# Altium PCB Pong_PCB.PcbDoc
Units mm, origin at the board's own origin, x right, y up, seen from the top; angles counter-clockwise.
Board outline 70 x 100 mm, 2 copper layers (Top Layer, Bottom Layer), stack 1.57 mm thick; 27 components, 30 nets, 132 pads, 17 vias.
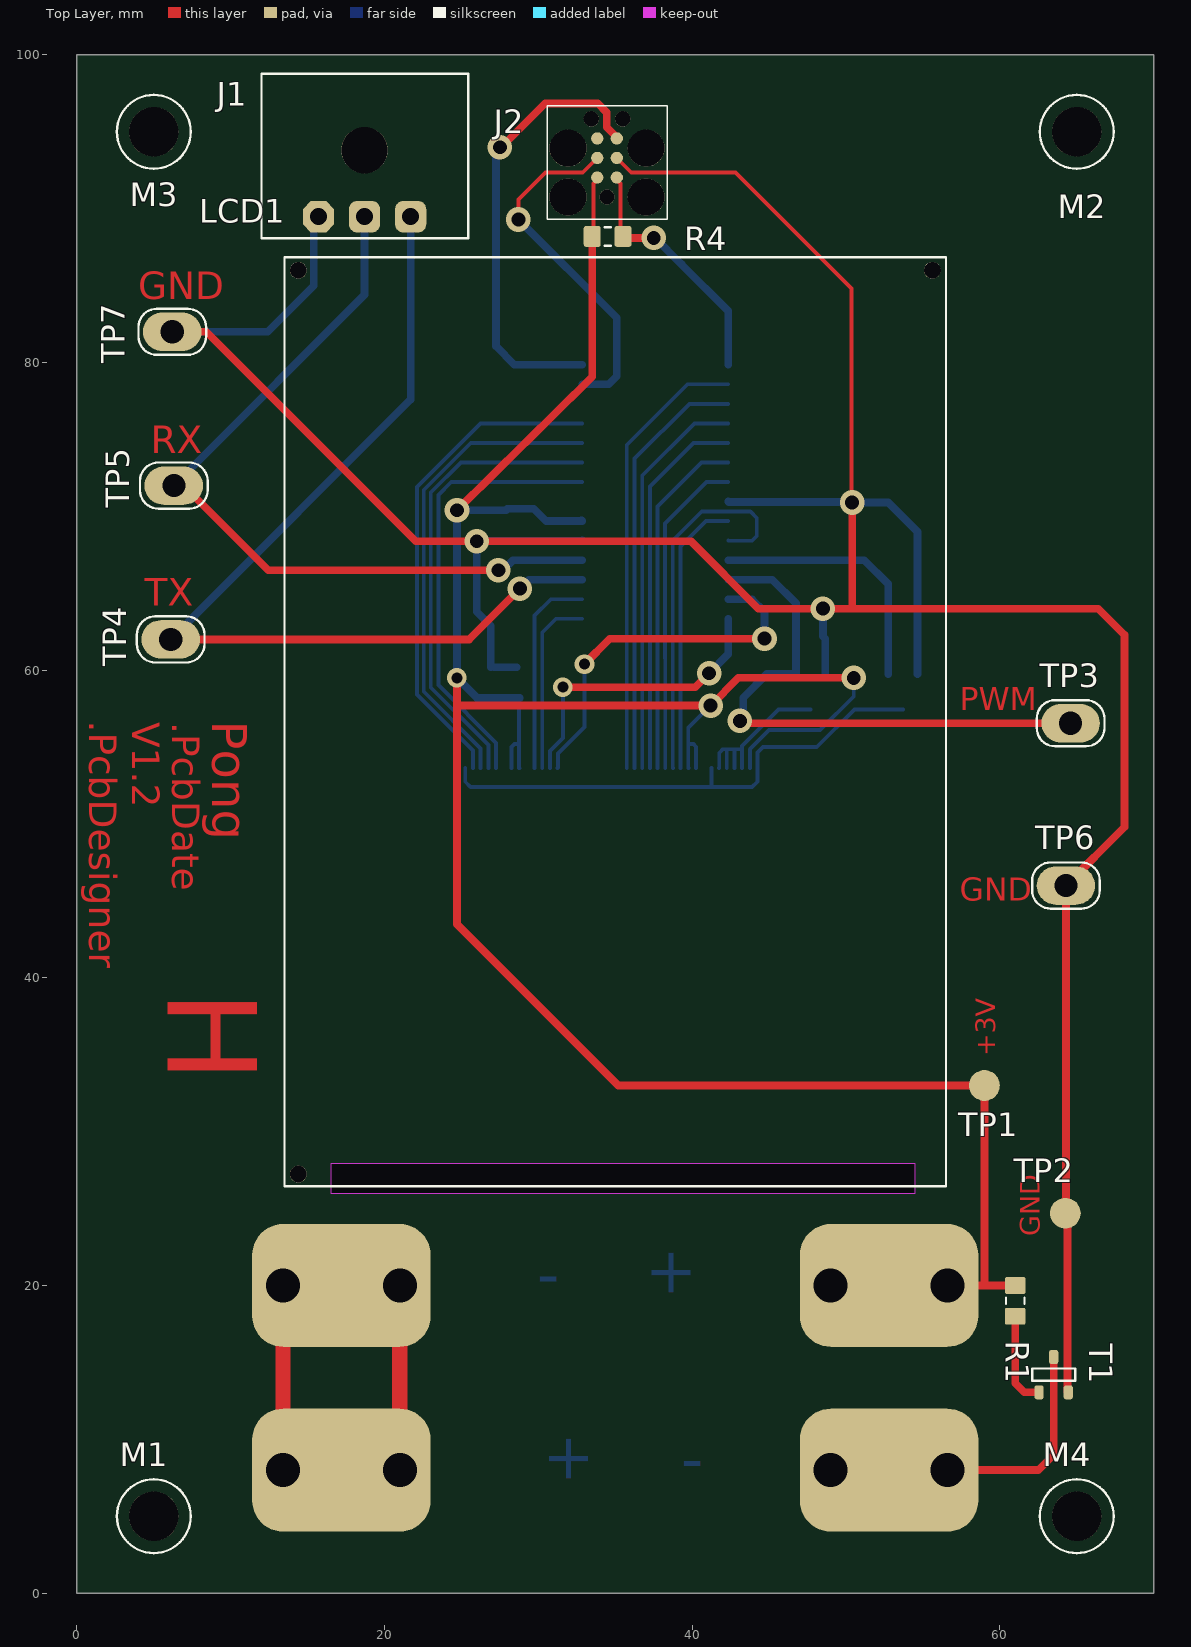
[diagram p0: Top Layer view]
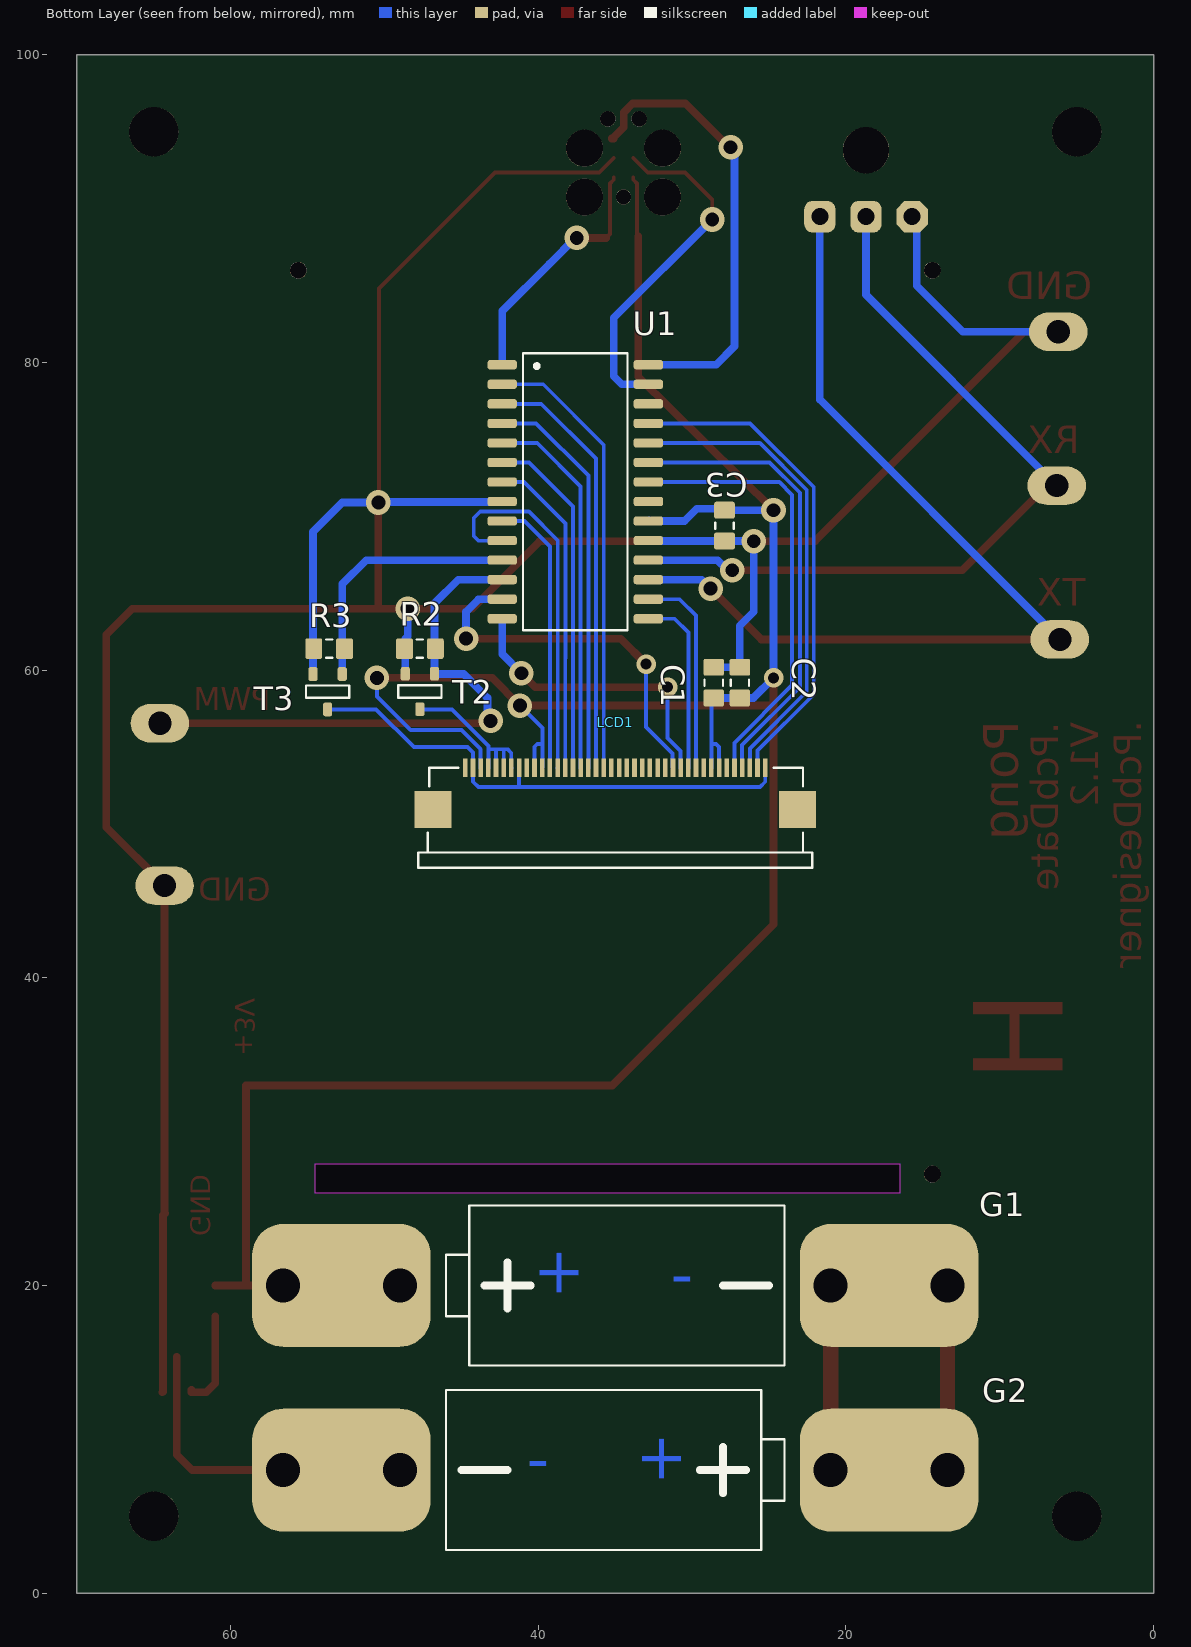
[diagram p1: Bottom Layer view, seen from below]
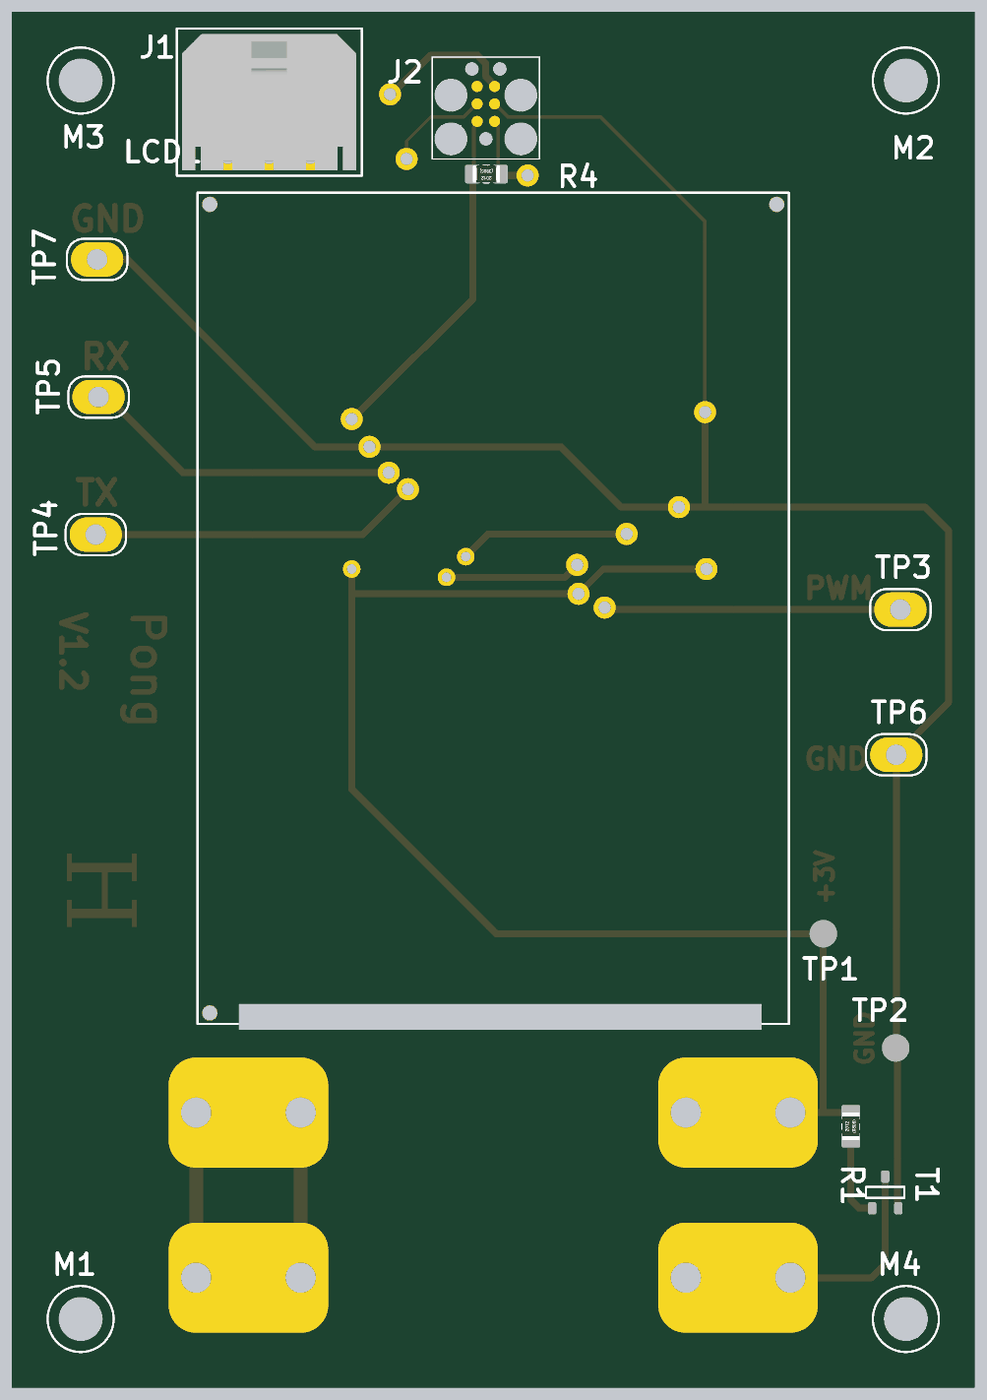
[diagram p2: 3D render of the assembled board from above, using the file's embedded part models]

## Layer stack, top to bottom
Top Layer: signal copper 0.035
Dielectric 1: core 1.5, FR-4, Dk 4.2
Bottom Layer: signal copper 0.035

## Board outline
0,0 0,100 70,100 70,0
cut-out: 16.5,27.9 16.5,26 54.5,26 54.5,27.9

## Design rules (kind name [scope] priority, off if disabled: settings)
AcuteAngle [All] p1: minimum=9.00000000000000E+0001 checktracksonly=TRUE
AssemblyTestPointUsage [All] p1 off:
AssemblyTestpoint [All] p1 off: testpointundercomponent=TRUE minsize=1.016 maxsize=2.54 preferedsize=1.524 minholesize=0 maxholesize=1.016 preferedholesize=0.813 testpointgrid=0.025 usegrid=TRUE gridtolerance=0 allowsidetop=TRUE allowsidebottom=TRUE
BoardOutlineClearance [All] p1 off: gap=0.25 ignorepadtopadclearanceinfootprint=FALSE
Clearance [All] p1: gap=0.2 ignorepadtopadclearanceinfootprint=FALSE except(0.8: Arc-Fill Arc-Poly Arc-Region Track-Fill Track-Poly Track-Region)
ComponentClearance [All] p1 off: gap=0.25 collisioncheckmode=3 verticalgap=0.25 showdistances=FALSE
DiffPairsRouting [All] p1 off: maxlimit=0.254 minlimit=0.254 mostfreqgap=0.254 toplayer_minwidth=0.381 toplayer_maxwidth=0.381 toplayer_prefwidth=0.381 bottomlayer_minwidth=0.381 bottomlayer_maxwidth=0.381 bottomlayer_prefwidth=0.381 maxuncoupledlength=12.7
FabricationTestPointUsage [All] p1 off: valid=0 allowmultiple=FALSE
FabricationTestpoint [All] p1 off: side=3 testpointundercomponent=TRUE minsize=1.016 maxsize=2.54 preferedsize=1.524 minholesize=0 maxholesize=1.016 preferedholesize=0.813 testpointgrid=0.025 allowsidetop=TRUE allowsidebottom=TRUE usegrid=TRUE gridtolerance=0
FanoutControl Fanout_BGA [IsBGA] p1 off: bgadir=Out bgaviamode=Centered fanoutstyle=Auto fanoutdirection=Alternating viagrid=0.025 // Fanout_BGA (Default Rule)
FanoutControl Fanout_LCC [IsLCC] p2 off: bgadir=Out bgaviamode=Centered fanoutstyle=Auto fanoutdirection=Alternating viagrid=0.025 // Fanout_LCC (Default Rule)
FanoutControl Fanout_SOIC [IsSOIC] p3 off: bgadir=Out bgaviamode=Centered fanoutstyle=Auto fanoutdirection=Alternating viagrid=0.025 // Fanout_SOIC (Default Rule)
FanoutControl Fanout_Small [(CompPinCount < 5)] p4 off: bgadir=Out bgaviamode=Centered fanoutstyle=Auto fanoutdirection=OutThenIn viagrid=0.025 // Fanout_Small (Default Rule)
FanoutControl Fanout_Default [All] p5 off: bgadir=Out bgaviamode=Centered fanoutstyle=Auto fanoutdirection=Alternating viagrid=0.025 // Fanout_Default (Default Rule)
Height [All] p1 off: minheight=0 maxheight=25.4 prefheight=12.7
HoleSize [All] p1 off: absolutevalues=TRUE maxlimit=3 minlimit=0.15 maxpercent=80.000 minpercent=20.000
HoleToHoleClearance [All] p1 off: gap=0.25 allowstackedmicrovias=TRUE
LayerPairs [All] p1 off: enforce=TRUE
MinimumAnnularRing [All] p1 off: minimumring=0.35
MinimumSolderMaskSliver [All] p1 off: minsoldermaskwidth=0
PasteMaskExpansion [All] p1 off: expansion=0
PlaneClearance [All] p1: clearance=0.25
PlaneConnect [All] p1 off: planeconnectstyle=Relief reliefexpansion=0.5 reliefentries=4 reliefconductorwidth=0.25 reliefairgap=0.25
PolygonConnect [All] p1: connectstyle=Relief reliefconductorwidth=0.25 reliefentries=4 polygonreliefangle="90 Angle" airgapwidth=0.25
RoutingCorners [All] p1 off: cornerstyle=45-Degree minsetback=2.5 maxsetback=2.5
RoutingLayers [All] p1 off: top layer_v5=TRUE bottom layer_v5=TRUE
RoutingPriority [All] p1 off: routingpriority=0
RoutingTopology [All] p1 off: topology=Shortest
RoutingVias [All] p1: holewidth=0.9 width=1.5 viastyle="Through Hole" minholewidth=0.9 minwidth=1.5 maxholewidth=0.9 maxwidth=1.5
SilkToBoardRegionClearance [All] p1 off:
SilkToSilkClearance [All] p1 off: silktosilkclearance=0
SilkToSolderMaskClearance [IsPad] p1 off: minsilkscreentomaskgap=0 clearancetoexposedcopper=TRUE
SolderMaskExpansion [All] p1 off: expansion=0
Width [All] p1: maxlimit=4 minlimit=0.15 preferedwidth=0.5
4 further rules are at their usual default settings.

## Components (designator, comment, footprint, x,y, rotation, side; value= is the part's Value field where it differs from the comment)
C1 "100nF" "CAPACITOR 2012 REFLOW" 28.6,59.192 r270 bottom
C2 "100nF" "CAPACITOR 2012 REFLOW" 26.9,59.193 r270 bottom
C3 "100nF" "CAPACITOR 2012 REFLOW" 27.9,69.4 r90 bottom
G1 "*" "1.5V Cell AAA/LR03" 35,20 r180 bottom
G2 "*" "1.5V Cell AAA/LR03" 35,8 r0 bottom
J1 "MOLEX 43650-0300" "MOLEX 43650-0300" 18.7,89.48 r180 top
J2 "TAG CONNECT TC2030-MCP-FP" "TAG CONNECT TC2030-MCP-FP" 34.465,93.3 r90 top locked
LCD1 "LCD-NHD-2.4-240320SF" LCD-NHD-2.4-240320SF 35,53.65 r0 top locked
M1 "*" "Screw M3X12 Unconnected" 5,5 r0 top
M2 "*" "Screw M3X12 Unconnected" 65,95 r0 top
M3 "*" "Screw M3X12 Unconnected" 5,95 r0 top
M4 "*" "Screw M3X12 Unconnected" 65,5 r0 top
R1 "10k" "RESISTOR 2012 REFLOW" 61,19 r90 top
R2 "10k" "RESISTOR 2012 REFLOW" 47.7,61.4 r180 bottom
R3 "10k" "RESISTOR 2012 REFLOW" 53.6,61.4 r180 bottom
R4 "10k" "RESISTOR 2012 REFLOW" 34.5,88.2 r180 top locked
T1 "Si2302CDS" "SOT23 P0.95 C1.6x3.0 H1.3" 63.5,14.2 r90 top
T2 "Si2302CDS" "SOT23 P0.95 C1.6x3.0 H1.3" 47.7,58.614 r270 bottom
T3 "Si2302CDS" "SOT23 P0.95 C1.6x3.0 H1.3" 53.7,58.6 r270 bottom
TP1 "VCC" "Pad D2.0" 59,33 r270 top
TP2 "GND" "Pad D2.0" 64.262,24.7 r270 top
TP3 "*" "Test Point Vogt 1016L.68M" 64.6,56.55 r0 top
TP4 "*" "Test Point Vogt 1016L.68M" 6.1,62 r180 top
TP5 "*" "Test Point Vogt 1016L.68M" 6.3,72 r180 top
TP6 "*" "Test Point Vogt 1016L.68M" 64.3,46 r0 top
TP7 "*" "Test Point Vogt 1016L.68M" 6.2,82 r180 top
U1 "PIC18LF25k22" "SO28 P1.27 C7.5X17.9 H2.7" 37.6,71.6 r180 bottom

## Footprints (in the part's own frame and the unit in brackets; to place one, negate y for a bottom-side part, rotate by r counter-clockwise, add the part's x,y. Pads: shape width x height; smd on the part's side, far side on the other; paste and mask are expansions set on the pad)
"1.5V Cell AAA/LR03" [mm] "Battery Cell D10.5 L44.5"
  rrect50% 8x8 hole 2.2 copper offset 2,0: 1(-21.6,0) 2(14,0)
  rrect50% 8x8 hole 2.2 copper offset -2,0: 1(-14,0) 2(21.6,0)
  silkscreen extent -11,-5.2 11,5.2, body extent -24,-5.4 24,5.4, height 13.5
"CAPACITOR 2012 REFLOW" [mm] "Capacitor SMD 2.0x1.2mm (0805-imperial)"
  rrect25% 1.1x1.35 smd: 1(-1,0) 2(1,0)
  silkscreen extent -0.2,-0.6 0.2,0.6, body extent -1,-0.6 1,0.6, height 1
LCD-NHD-2.4-240320SF [mm] "LCD-NHD-2.4-240320SF"
  round 1.1 hole 1.1 paste-25.4 mask-25.4: 0(-20.61,-26.41) 0(-20.61,32.35) 0(20.61,32.35)
  rect 2.4x2.4 smd far side: 0(-11.85,-2.7) 0(11.86,-2.7)
  rect 0.3x1.2 smd far side: 1(-9.75,0) 2(-9.25,0) 3(-8.75,0) 4(-8.25,0) 5(-7.75,0) 6(-7.25,0) 7(-6.75,0) 8(-6.25,0) 9(-5.75,0) 10(-5.25,0) 11(-4.75,0) 12(-4.25,0) 13(-3.75,0) 14(-3.25,0) 15(-2.75,0) 16(-2.25,0) 17(-1.75,0) 18(-1.25,0) 19(-0.75,0) 20(-0.25,0) 21(0.25,0) 22(0.75,0) 23(1.25,0) 24(1.75,0) 25(2.25,0) 26(2.75,0) 27(3.25,0) 28(3.75,0) 29(4.25,0) 30(4.75,0) 31(5.25,0) 32(5.75,0) 33(6.25,0) 34(6.75,0) 35(7.25,0) 36(7.75,0) 37(8.25,0) 38(8.75,0) 39(9.25,0) 40(9.75,0)
  silkscreen extent -21.5,-27.2 21.5,33.2, body extent -21.43,-27.17 21.43,33.18, height 3.87
"MOLEX 43650-0300" [mm] "Micro-Fit 3.0 Right Angle Header, 3.00mm Pitch, Single Row, 3 Circuits"
  round 3 hole 3 paste-25.4 mask-25.4: 0(0,-4.32)
  oct 2.032x2.032 hole 1.1: 1(3,0)
  rrect50% 2.032x2.032 hole 1.1: 2(0,0) 3(-3,0)
  silkscreen extent -6.75,-9.3 6.7,1.4, body extent -6.32,-8.9 6.32,1, height 5.58
"Pad D2.0" [mm] "Test Point simple pad diameter 2.0, no hole"
  round 2 smd: 1(0,0)
"RESISTOR 2012 REFLOW" [mm] "Resistor SMD 2.0x1.2mm (0805-imperial)"
  rrect25% 1.1x1.35 smd: 1(-1,0) 2(1,0)
  silkscreen extent -0.2,-0.6 0.2,0.6, body extent -1,-0.62 1,0.63, height 0.45
"Screw M3X12 Unconnected" [mm] "Standard Screw M3X12 Unconnected BN330"
  round 3.2 hole 3.2 unplated paste+0 mask+0: 0(0,0)
  silkscreen extent -2.4,-2.4 2.4,2.4, body extent -2.29,-2.3 2.29,2.3, height 2
"SO28 P1.27 C7.5X17.9 H2.7" [mm] "SOIC, 28-Leads, Body 17.9x7.50mm, Pitch 1.27mm, IPC Medium Density"
  rrect50% 1.9x0.6 smd: 1(-4.75,8.255) 2(-4.75,6.985) 3(-4.75,5.715) 4(-4.75,4.445) 5(-4.75,3.175) 6(-4.75,1.905) 7(-4.75,0.635) 8(-4.75,-0.635) 9(-4.75,-1.905) 10(-4.75,-3.175) 11(-4.75,-4.445) 12(-4.75,-5.715) 13(-4.75,-6.985) 14(-4.75,-8.255) 15(4.75,-8.255) 16(4.75,-6.985) 17(4.75,-5.715) 18(4.75,-4.445) 19(4.75,-3.175) 20(4.75,-1.905) 21(4.75,-0.635) 22(4.75,0.635) 23(4.75,1.905) 24(4.75,3.175) 25(4.75,4.445) 26(4.75,5.715) 27(4.75,6.985) 28(4.75,8.255)
  silkscreen extent -3.4,-9 3.4,9, body extent -12.4,-8.96 5.16,8.97, height 2.48
"SOT23 P0.95 C1.6x3.0 H1.3" [mm] "SOT23, 3-Leads, Body 1.6x3.0mm, Pitch 0.95mm, IPC Medium Density"
  rrect50% 0.9x0.6 smd: 1(-1.15,0.95) 2(-1.15,-0.95) 3(1.15,0)
  silkscreen extent -0.4,-1.4 0.4,1.4, body extent -0.8,-1.5 0.8,1.5, height 1.3
"TAG CONNECT TC2030-MCP-FP" [mm] "TAG CONNECT TC2030-MCP-FP"
  round 2.4 hole 2.4 unplated paste-1.27: 0(-2.54,-2.54) 0(-2.54,2.54) 0(0.635,2.54) 0(0.635,-2.54)
  round 1 hole 1 unplated paste-1.27: 0(-2.54,0) 0(2.54,-1.016) 0(2.54,1.016)
  round 0.8 smd paste-1.27: 1(-1.27,-0.635) 2(-1.27,0.635) 3(0,-0.635) 4(0,0.635) 5(1.27,-0.635) 6(1.27,0.635)
  silkscreen extent -4,-3.9 3.4,3.9
"Test Point Vogt 1016L.68M" [mm] "Test Point Vogt 1016L.68M"
  oval 3.8x2.5 hole 1.5: 1(0,0)
  silkscreen extent -2.2,-1.5 2.2,1.5, body extent -1.75,-0.31 1.75,0.31, height 6

## Part data
C1 C2 C3: library part Capacitor, "Capacitor"
G1 G2: library part Battery, "Battery Generic"
J1: "Micro-Fit 3.0 Right-Angle Header, 3.00mm Pitch, Single Row, 3 Circuits"
LCD1: "NEWHEAVEN LCD"
M1 M2 M3 M4: library part "Screw Unconnected", "Screw Unconnected BN330"
R1 R2 R3 R4: library part Resistor, "Resistor"
T1 T2 T3: library part "MOS-N SOT23 G-S-D", "Generic MOS-N"
TP1 TP2: library part Pad, "Pad"
TP3 TP4 TP5 TP6 TP7: library part "Test Point", "Test Point"
U1: library part PIC18F2_K22-_/SO, "Flash Microcontrollers  with 10-Bit A/D and nanoWatt Technology"

## Via types
v1: diameter 1.6, hole 0.9, Top Layer to Bottom Layer, 14 vias
v2: diameter 1.27, hole 0.711, Top Layer to Bottom Layer, 3 vias

## Nets (pads, with @x,y where several pads share a name; then routed paths per layer and width w, separated by ;. In a path a pad name is that pad's centre, name@x,y a point inside that pad or via, vN(x,y) a via of type N, cw(c..) or ccw(c..) an arc to the next point about the centre after c; other vN are vias at no path point)
+3V: C1.2 C2.2 C3.2 G1.1 J2.2 LCD1.7 LCD1.8 LCD1.30 LCD1.31 LCD1.38 R1.2 R4.2 TP1.1 U1.20 | length 172.4
  Top Layer w0.254: R4.2@33.588,87.688 33.588,91.64 33.83,91.882 J2.2
  Top Layer w0.5: v2(24.71,59.5) 24.71,57.7 ; v1(24.71,70.4) 33.5,79.067 R4.2 ; v1(50.5,59.5) 43,59.5 v1(41.2,57.7) 24.71,57.7 ; G1.1@56.6,20 59,20 ; R1.2 59,20 ; 24.71,57.7 24.71,43.49 35.2,33 TP1.1 59,20
  Bottom Layer w0.25: LCD1.7 28.25,54.995 28.455,55.2 28.75,55.2 ; LCD1.8@28.775,53.625 LCD1.8 28.75,55.2 ; C1.2@28.8,58.192 28.75,58.143 28.75,55.2 ; LCD1.30 39.74,53.66 39.74,55.2 ; LCD1.31 40.25,54.85 40.25,55.025 40.075,55.2 39.74,55.2 ; v1(41.2,57.7) 39.74,56.24 39.74,55.2 ; LCD1.38 43.75,54.864 44.986,56.1 48.3,56.1 50.5,58.3 v1(50.5,59.5)
  Bottom Layer w0.5: C1.2@28.8,58.192 C2.2 26.017,58.192 v2(24.71,59.5) v1(24.71,70.4) C3.2 28,70.5 29.7,70.5 30.505,69.695 U1.20 U1.20@32.8,69.745
GND: C1.1 C2.1 C3.1 J1.1 J2.3 R2.1 R3.1 T1.2 T2.2 T3.2 TP2.1 TP6.1 TP7.1 U1.8 U1.19 | length 219.3
  Top Layer w0.25: J2.3 36.042,92.358 42.816,92.358 50.367,84.807 v1@50.367,70.9
  Top Layer w0.5: TP7.1 8.4,82 22.021,68.379 v1(26,68.379) 39.921,68.379 44.3,64 v1(48.5,64) 50.367,64 ; v1@50.367,70.9 v1@50.381,70.9 ; v1(50.4,70.9) 50.4,64.033 50.367,64 ; TP2.1 TP2.1@64.3,24.662 ; T1.2 64.4,13.1 64.4,24.562 TP2.1@64.3,24.662 ; 50.367,64 66.4,64 68.1,62.3 68.1,49.8 TP6.1 TP2.1@64.3,24.662
  Bottom Layer w0.25: 26.8,62.992 26.9,62.892
  Bottom Layer w0.5: TP7.1 12.4,82 15.4,85 15.4,89.18 J1.1 ; 26.8,62.992 26,63.792 v1(26,68.379) 26.021,68.4 C3.1 32.825,68.4 U1.19 ; C2.1 26.9,62.892 ; C2.1@27.1,60.192 C1.1 ; U1.8 42.383,70.932 50.368,70.932 v1(50.4,70.9) 52.75,70.9 54.65,69 T3.2 ; v1(48.5,64) 48.5,62.2 48.65,62.05 48.65,61.4 T2.2@48.65,59.75
NetG1_2: G1.2 G2.1 | length 31.6
  Top Layer w1: G2.1@13.4,8 13.4,20 21,20 G2.1@21,8
NetG2_2: G2.2 T1.3 | length 23.3
  Top Layer w0.5: G2.2@47.755,8.1 G2.2@55.355,8.1 ; G2.2@56.6,10 56.6,8 62.5,8 63.5,9 T1.3
NetJ1_2: J1.2 TP5.1 U1.18 | length 51.8
  Top Layer w0.5: TP5.1 6.95,72 12.45,66.5 v1(27.4,66.5)
  Bottom Layer w0.5: TP5.1 6.409,72 7.333,72.924 7.333,73.033 18.7,84.4 J1.2 ; v1(27.4,66.5) 27.698,66.5 28.353,67.155 U1.18
NetJ1_3: J1.3 TP4.1 U1.17 | length 62.4
  Top Layer w0.5: TP4.1 25.5,62 v1(28.8,65.3)
  Bottom Layer w0.5: TP4.1 6.209,62 7.133,62.924 7.133,63.033 21.7,77.6 J1.3 ; v1(28.8,65.3) 29.385,65.885 U1.17
NetJ2_1: J2.1 R4.1 U1.1 | length 16.4
  Top Layer w0.254: J2.1 35.1,91.882 35.342,91.64 35.342,88.358 R4.1 R4.1@35.6,88.1
  Top Layer w0.508: R4.1@35.6,88.1 v1(37.5,88.1) v1@37.45,88.15
  Bottom Layer w0.5: v1@37.55,88.15 39.3,86.4 42.35,83.35 U1.1
NetJ2_4: J2.4 U1.27 | length 22.9
  Top Layer w0.25: v1(28.7,89.3) 28.7,90.6 30.458,92.358 32.888,92.358 J2.4
  Bottom Layer w0.5: v1(28.7,89.3) 35.1,82.9 35.1,79.1 34.585,78.585 U1.27
NetJ2_5: J2.5 U1.28 | length 29.6
  Top Layer w0.5: v1(27.5,94) 27.6,94 30.444,96.844 33.865,96.844 34.453,96.256 34.453,95.296 35.1,94.649 J2.5 J2.5@35.22,94.57
  Bottom Layer w0.5: v1(27.5,94) 27.25,93.75 27.25,81.05 28.445,79.855 U1.28
NetLCD1_1: LCD1.1 LCD1.33 LCD1.39 T3.3 | length 33.9
  Bottom Layer w0.25: LCD1.1 25.25,52.75 25.6,52.4 41.25,52.4 ; LCD1.33 41.25,52.4 ; T3.3 50.55,57.45 48.095,54.995 44.603,54.995 44.25,54.642 LCD1.39 44.25,52.75 43.9,52.4 41.25,52.4
NetLCD1_2: LCD1.2 U1.25 | length 32.2
  Bottom Layer w0.25: LCD1.2 25.75,54.777 22.1,58.427 22.1,71.909 26.236,76.045 U1.25
NetLCD1_3: LCD1.3 U1.24 | length 31.2
  Bottom Layer w0.25: LCD1.3 26.25,54.914 22.55,58.614 22.55,71.723 25.602,74.775 U1.24
NetLCD1_4: LCD1.4 U1.23 | length 30.1
  Bottom Layer w0.25: LCD1.4 26.75,55.139 23,58.889 23,71.536 24.969,73.505 U1.23
NetLCD1_5: LCD1.5 U1.22 | length 29
  Bottom Layer w0.25: LCD1.5 27.25,55.275 23.5,59.025 23.5,71.4 24.335,72.235 U1.22
NetLCD1_10: LCD1.10 U1.16 | length 13.4
  Bottom Layer w0.25: LCD1.10 29.75,63.55 30.815,64.615 U1.16
NetLCD1_11: LCD1.11 U1.15 | length 11.8
  Bottom Layer w0.25: LCD1.11 30.25,62.45 31.145,63.345 U1.15
NetLCD1_12: LCD1.12 U1.14 | length 19.5
  Top Layer w0.5: v2(31.6,58.9) 40.2,58.9 v1(41.1,59.8)
  Bottom Layer w0.25: LCD1.12 30.75,54.75 31.6,55.6 v2(31.6,58.9)
  Bottom Layer w0.5: v1(41.1,59.8) 42.35,61.05 U1.14
NetLCD1_13: LCD1.13 U1.13 | length 24.3
  Top Layer w0.5: v2(33,60.4) 34.65,62.05 v1(44.7,62.05)
  Bottom Layer w0.25: LCD1.13 31.275,53.675 31.275,54.575 33,56.3 v2(33,60.4)
  Bottom Layer w0.5: U1.13 43.885,64.615 44.7,63.8 v1(44.7,62.05)
NetLCD1_22: LCD1.22 U1.2 | length 29.2
  Bottom Layer w0.25: LCD1.22 35.75,74.65 39.685,78.585 U1.2
NetLCD1_23: LCD1.23 U1.3 | length 27.7
  Bottom Layer w0.25: LCD1.23 36.25,73.75 39.815,77.315 U1.3
NetLCD1_24: LCD1.24 U1.4 | length 26
  Bottom Layer w0.25: LCD1.24 36.75,72.65 40.145,76.045 U1.4
NetLCD1_25: LCD1.25 U1.5 | length 24.6
  Bottom Layer w0.25: LCD1.25 37.25,71.95 40.075,74.775 U1.5
NetLCD1_26: LCD1.26 U1.6 | length 22.8
  Bottom Layer w0.25: LCD1.26 37.75,70.65 40.605,73.505 U1.6
NetLCD1_27: LCD1.27 U1.7 | length 21.1
  Bottom Layer w0.25: LCD1.27 38.25,60.75 38.225,60.775 38.225,69.525 40.935,72.235 U1.7
NetLCD1_28: LCD1.28 U1.10 | length 24.4
  Bottom Layer w0.25: LCD1.28 38.74,53.66 38.74,68.44 40.62,70.32 43.78,70.32 44.2,69.9 44.2,68.712 43.9,68.412 42.363,68.412 U1.10
NetLCD1_29: LCD1.29 U1.9 | length 18.2
  Bottom Layer w0.25: LCD1.29 39.25,68.05 40.895,69.695 U1.9
NetLCD1_34: LCD1.34 LCD1.35 LCD1.36 LCD1.37 T2.3 | length 11.9
  Bottom Layer w0.25: LCD1.34 41.761,53.661 41.761,54.625 42,54.864 42.275,54.864 ; LCD1.35 42.25,54.839 42.275,54.864 ; LCD1.36 42.75,54.814 42.8,54.864 ; LCD1.37 43.248,53.652 43.248,54.864 ; T2.3@47.7,57.45 45.618,57.45 43.248,55.079 43.248,54.864 ; 42.275,54.864 42.8,54.864 ; 42.8,54.864 43.248,54.864
NetR1_1: R1.1 T1.1 | length 6.3
  Top Layer w0.5: R1.1 61,13.643 61.593,13.05 T1.1 T1.1@62.55,13.2
NetR2_2: R2.2 T2.1 TP3.1 U1.12 | length 36.7
  Top Layer w0.5: v1@43.25,56.55 TP3.1
  Bottom Layer w0.5: U1.12 45.215,65.885 46.75,64.35 T2.1 46.75,59.75 44.853,59.75 43.31,58.207 43.31,56.91 v1(43.1,56.7)
NetR3_2: R3.2 T3.1 U1.11 | length 16.9
  Bottom Layer w0.5: U1.11 51.195,67.155 52.75,65.6 T3.1
pads on no net: J1.0 J2.0 J2.6 LCD1.0 LCD1.6 LCD1.9 LCD1.14 LCD1.15 LCD1.16 LCD1.17 LCD1.18 LCD1.19 LCD1.20 LCD1.21 LCD1.32 LCD1.40 M1.0 M2.0 M3.0 M4.0 U1.21 U1.26

## Polygon pours and split planes (outlines as drawn)
no net on Top Layer "Top Layer-No Net" (solid, pour order 4): 69.3,99.6
no net on Bottom Layer "Bottom Layer-No Net" (solid, pour order 14): 69.3,98.7

## Other copper
Top Layer:
  text "GND" at 4,84.1 h1.78
  text "RX" at 4.8,74.1 h1.78
  text "TX" at 4.4,64.2 h1.78
  text "PWM" at 57.4,57.4 h1.5
  text ".PcbDesigner" at 0.8,56.7 h1.78 r270
  text "Pong" at 8.8,56.7 h2.29 r270
  text "V1.2" at 3.6,56.6 h1.78 r270
  text ".PcbDate" at 6.2,56.6 h1.78 r270
  text "GND" at 57.4,45 h1.5
  text "H" at 4,39.2 h10 r270
  text "+3V" at 59.7,34.9 h1.27 r90
  text "GND" at 62.6,23.2 h1.27 r90
Bottom Layer:
  text "-" at 31.4,21.5 h3 r180
  text "+" at 39.9,19.1 h3 r90
  text "-" at 40.75,9.5 h3 r180
  text "+" at 33.25,7 h3 r90

## Silkscreen, mask and mechanical layers (free items; w line width, h text height)
Mechanical 1:
  lines w0.15: 0,0 0,100 70,100 70,0 0,0 ; 16.5,26 16.5,27.9 54.5,27.9 54.5,26 16.5,26
Drill Drawing:
  circle w0.254: c-7.144,123.12 r0.508
  circle w0.254: c-7.144,123.12 r0.847
  circle w0.254: c-7.144,119.31 r0.847
  lines w0.254: -7.991,111.69 -7.144,110.843 -6.297,111.69 -7.144,112.537 -7.991,111.69 ; -7.991,116.347 -6.297,116.347 -7.144,114.653 -7.991,116.347 ; -7.991,126.083 -7.144,126.507 -6.297,126.083 -6.721,126.93 -6.297,127.777 -7.144,127.353 -7.991,127.777 -7.567,126.93 -7.991,126.083 ; -7.991,130.317 -7.567,130.317 -7.144,129.893 -6.721,130.317 -6.297,130.317 -6.721,130.74 -6.297,131.163 -6.721,131.163 -7.144,131.587 -7.567,131.163 -7.991,131.163 -7.567,130.74 -7.991,130.317 ; -7.991,133.703 -6.297,133.703 -6.297,135.397 -7.991,135.397 -7.991,133.703 ; -7.991,137.937 -7.567,137.937 -7.567,137.513 -6.721,137.513 -6.721,137.937 -6.297,137.937 -6.297,138.783 -6.721,138.783 -6.721,139.207 -7.567,139.207 -7.567,138.783 -7.991,138.783 -7.991,137.937 ; -7.991,141.323 -7.991,141.747 -7.567,142.17 -7.991,142.593 -7.991,143.017 -7.567,143.017 -7.144,142.593 -6.721,143.017 -6.297,143.017 -6.297,142.593 -6.721,142.17 -6.297,141.747 -6.297,141.323 -6.721,141.323 -7.144,141.747 -7.567,141.323 -7.991,141.323
  lines w0.381: -9.51,109.7 67.178,109.7 ; -9.51,143.99 67.178,143.99 ; 4.483,105.89 4.483,147.8 ; 18.195,105.89 18.195,147.8 ; 47.397,105.89 47.397,147.8 ; -9.51,105.89 67.178,105.89 67.178,147.8 -9.51,147.8 -9.51,105.89
  text "Symbol" at -7.224,145.133 h1.83
  text "Count" at 5.626,145.133 h1.83
  text "Hole Size" at 19.338,145.133 h1.83
  text "Hole Type" at 48.54,145.133 h1.83
  text "3" at 5.626,141.323 h1.52
  text "0.711mm (28.00mil)" at 19.338,141.323 h1.52
  text "Round" at 48.54,141.323 h1.52
  text "14" at 5.626,137.513 h1.52
  text "0.900mm (35.43mil)" at 19.338,137.513 h1.52
  text "Round" at 48.54,137.513 h1.52
  text "3" at 5.626,133.703 h1.52
  text "1.000mm (39.37mil)" at 19.338,133.703 h1.52
  text "Round" at 48.54,133.703 h1.52
  text "6" at 5.626,129.893 h1.52
  text "1.100mm (43.31mil)" at 19.338,129.893 h1.52
  text "Round" at 48.54,129.893 h1.52
  text "5" at 5.626,126.083 h1.52
  text "1.500mm (59.06mil)" at 19.338,126.083 h1.52
  text "Round" at 48.54,126.083 h1.52
  text "8" at 5.626,122.273 h1.52
  text "2.200mm (86.61mil)" at 19.338,122.273 h1.52
  text "Round" at 48.54,122.273 h1.52
  text "4" at 5.626,118.463 h1.52
  text "2.400mm (94.49mil)" at 19.338,118.463 h1.52
  text "Round" at 48.54,118.463 h1.52
  text "1" at 5.626,114.653 h1.52
  text "3.000mm (118.11mil)" at 19.338,114.653 h1.52
  text "Round" at 48.54,114.653 h1.52
  text "4" at 5.626,110.843 h1.52
  text "3.200mm (125.98mil)" at 19.338,110.843 h1.52
  text "Round" at 48.54,110.843 h1.52
  text "48 Total" at 5.626,107.033 h1.52